# Altium PCB PCB1.PcbDoc (part 2 of 2)
Units mil, origin at the board's own origin, x right, y up, seen from the top; angles counter-clockwise.
Board outline 2954.24 x 1620.63 mil, 4 copper layers (Signal+GND, Signal, PWR, GND), stack 63.303 mil thick; 109 components, 81 nets, 322 pads, 116 vias.
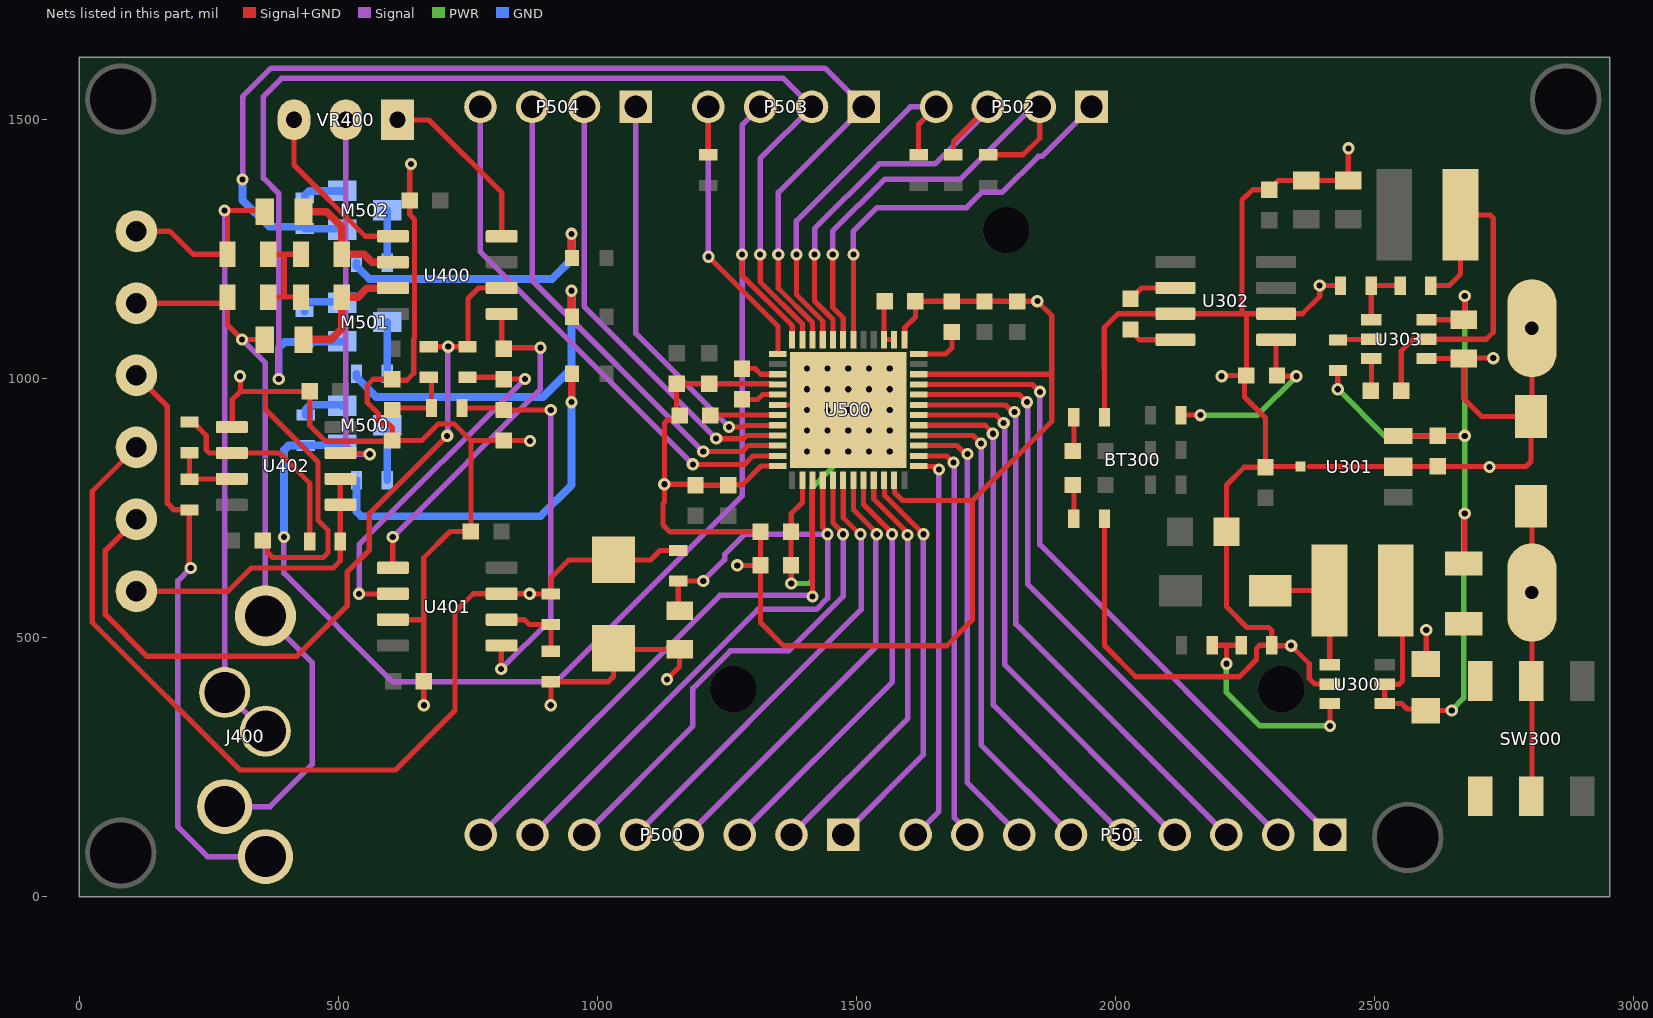
[diagram p4: the nets of this part, all layers, seen from the top]

## Via types
v1: diameter 23.62, hole 11.81, Signal+GND to GND, 116 vias

## Nets (pads, with @x,y where several pads share a name; then routed paths per layer and width w, separated by ;. In a path a pad name is that pad's centre, name@x,y a point inside that pad or via, vN(x,y) a via of type N, cw(c..) or ccw(c..) an arc to the next point about the centre after c; other vN are vias at no path point) (continued)
-5_ADC: C507.2 C508.2 U500.18 U500.26 U500.49 | length 763.9
  Signal+GND w10: U500.18@1348.44,949.84 1474.43,949.84 v1(1484.27,940) v1(1404.27,940) ; v1(1374.24,605) 1374.24,639.53 C508.2@1373.77,640 C507.2@1373.77,705 1374.24,705.47 1374.24,740 1395.69,761.45 U500.26@1395.69,804.17 ; U500.49@1395.69,848.8 1404.27,857.38 v1(1404.27,860)
  PWR w10.57: v1(1374.24,605) 1408.81,605 1415,611.19 1415,790.73 v1(1484.27,860)
  other v1: 1444.27,860 1524.27,860 1564.27,860 1404.27,900 1444.27,900 1484.27,900 1524.27,900 1564.27,900 1444.27,940 1524.27,940 1564.27,940 1404.27,980 1444.27,980 1484.27,980 1524.27,980 1564.27,980 1404.27,1020 1444.27,1020 1484.27,1020 1524.27,1020 1564.27,1020
-5OUT: C311.2 R309.1 U302.5 | length 361.5
  Signal+GND w10: R309.1@2126.8,929.82 2126.98,930 v1(2164.24,930) ; U302.5@2310.22,1075.63 2310.22,1008.25 2313.46,1005 v1(2349.24,1005)
  PWR w10.57: v1(2164.24,930) 2164.42,929.82 2274.07,929.82 v1(2349.24,1005)
A\D\C\_\R\D\Y\: P502.2 R501.1 U500.7 | length 889.8
  Signal+GND w10: v1(1454.24,1240) 1454.24,1137.74 1474.43,1117.55 U500.7@1474.43,1075.83 ; R501.1@1754.24,1432.49 1821.74,1432.49 1853.78,1464.54 P502.2@1853.78,1525
  Signal w10.57: v1(1454.24,1240) 1454.24,1285 1554.24,1385 1699.66,1385 1839.66,1525 P502.2@1853.78,1525
A\L\E\R\T\: P502.4 R503.1 U500.9 | length 717.4
  Signal+GND w10: v1(1384.24,1240) 1384.24,1162.49 1435.06,1111.67 U500.9@1435.06,1075.83 ; R503.1@1619.99,1432.49 1619.99,1491.21 P502.4@1653.78,1525
  Signal w10.57: v1(1384.24,1240) 1384.24,1305 1604.24,1525 P502.4@1653.78,1525
CCOMP: P500.1 U500.34 | length 779.7
  Signal+GND w10: U500.34@1553.17,804.17 1554.07,803.27 1554.07,775.17 v1(1629.24,700)
  Signal w10.57: P500.1@1474.7,120 1629.24,274.54 v1(1629.24,700)
DO_SNK_GATE: P501.2 U500.44 | length 1251.1
  Signal+GND w10: U500.44@1620.1,969.53 1814.71,969.53 v1(1829.24,955)
  Signal w10.57: v1(1829.24,955) 1830.81,953.43 1830.81,603.43 P501.2@2314.24,120
DO_SNK_INT: P501.1 U500.45 | length 1327
  Signal+GND w10: U500.45@1620.1,989.21 1840.03,989.21 v1(1854.24,975)
  Signal w10.57: v1(1854.24,975) 1854.24,680 P501.1@2414.24,120
DO_SNK_SNS: P501.3 U500.43 | length 1176.2
  Signal+GND w10: U500.43@1620.1,949.84 1787.61,949.84 1801.5,935.95 v1(1805.19,935.95)
  Signal w10.57: v1(1805.19,935.95) 1807.68,933.45 1807.68,526.56 P501.3@2214.24,120
DO_SRC_DGATE: P501.8 U500.38 | length 802.4
  Signal+GND w10: U500.38@1620.1,851.42 1674.14,851.42 1687.09,838.47 v1(1687.62,838.47)
  Signal w10.57: v1(1687.62,838.47) 1689.24,836.84 1689.24,152.4 1714.24,127.4 P501.8@1714.24,120
DO_SRC_GATE: P501.7 U500.39 | length 877.2
  Signal+GND w10: U500.39@1620.1,871.1 1694.45,871.1 1710.56,855 v1(1714.24,855)
  Signal w10.57: v1(1714.24,855) 1714.24,220 P501.7@1814.24,120
DO_SRC_INT: P501.5 U500.41 | length 1029.1
  Signal+GND w10: U500.41@1620.1,910.47 1748.77,910.47 1763.3,895.95 v1(1763.3,894.05)
  Signal w10.57: v1(1763.3,894.05) 1764.24,893.11 1764.24,370 P501.5@2014.24,120
DO_SRC_SNS: P501.6 U500.40 | length 953.9
  Signal+GND w10: U500.40@1620.1,890.79 1724.77,890.79 v1(1740.56,875)
  Signal w10.57: v1(1740.56,875) 1740.56,293.69 P501.6@1914.24,120
DO_VDD: P501.4 U500.42 | length 1102.1
  Signal+GND w10: U500.42@1620.1,930.16 1769.08,930.16 v1(1784.24,915)
  Signal w10.57: v1(1784.24,915) 1786.39,912.85 1786.39,447.85 P501.4@2114.24,120
GND: BT300.N C300.1 C301.1 C302.1 C303.2 C307.2 C308.1 C309.1 C310.1 C311.1 C403.1 C404.1 C405.1 C406.2 C407.1 C408.2 C409.1 C410.2 C500.1 C501.1 C502.1 C503.2 C504.1 C505.1 C506.1 C507.1 C508.1 C510.1 C511.1 C512.1 D301.1 D500.2 M500.2 M501.2 M502.2 R301.1 R302.1 R303.1 R305.1 R409.1 R508.1 R509.1 R510.1 U300.2 U301.2 U301.4 U302.3 U302.6 U303.1 U401.3 U402.5 U500.1 U500.16 U500.24 U500.35 U500.46 | length 10242.2
  Signal+GND w10: U402.5@294.24,906.95 295,907.71 295,960 310.92,975.92 ; v1(310,1005) 310.92,1004.08 310.92,975.92 ; C409.1@353.77,687.98 363.23,678.52 363.23,664.74 372.97,655 470.8,655 480,664.2 480,707.8 460.71,727.08 460.71,839.29 359.08,940.92 359.08,975.92 ; U401.3@605.44,535 664.77,535 ; v1(640,1415) 637.78,1412.78 C405.1@637.78,1344.16 637.78,1317.22 647.15,1307.85 647.15,1079.13 645.53,1077.5 645.53,1010.78 631.92,997.18 606.21,997.18 C406.2@604.24,999.14 567.45,999.14 555.77,987.46 555.77,954.23 577.49,932.51 577.49,919.62 584.42,912.69 597.31,912.69 604.24,905.76 C403.1@604.24,880.87 ; v1(665,370) 664.77,370.23 C407.1@664.77,416.23 664.77,535 ; v1(870,880) 869.13,880.87 C404.1@819.24,880.87 755.87,880.87 755.72,880.72 ; v1(910,370) 910.24,370.24 R409.1@910.24,415.23 1020.99,415.23 1031,425.24 D500.2@1031,479.96 1033.16,477.79 C504.1@1158.63,477.79 1158.63,444.38 v1(1134.24,420) ; v1(1270,640) C508.1@1314.71,640 ; U500.24@1348.44,831.73 1315.97,831.73 1279.87,795.63 1253.5,795.63 C505.1@1252.4,794.53 C506.1@1189.24,794.53 1187.27,796.5 v1(1129.24,796.5) ; U500.16@1348.44,989.21 1337.62,989.21 1336.36,990.47 C512.1@1216.08,990.47 C511.1@1152.92,990.47 1152.92,935.35 C510.1@1159,929.28 1150.18,920.47 1135.1,920.47 1129.24,914.61 v1(1129.24,796.5) ; U500.35@1572.85,804.17 1573.76,803.27 1573.76,780.48 1589.24,765 1724.24,765 ; U500.1@1592.54,1075.83 1593.44,1076.73 1593.44,1099.2 1613.77,1119.53 C503.2@1613.77,1150 1810.09,1150 C500.1@1810.56,1149.53 1811.03,1150 v1(1849.24,1150) 1877.05,1122.19 1877.05,917.81 1724.24,765 ; U500.46@1620.1,1008.9 1877.05,1008.9 ; R303.1@1978.77,729.86 1978.77,485.47 2039.24,425 2239.2,425 2272.27,458.07 2272.27,479.77 2278.13,485.63 R301.1@2301.8,485.63 ; R302.1@1978.77,925.92 1978.77,1018.7 1978.38,1019.08 1978.38,1099.14 2004.87,1125.63 U302.3@2115.73,1125.63 2244.24,1125.63 ; v1(2205,1005) 2206.66,1006.66 C311.1@2252.75,1006.66 ; U301.4@2357.31,830.63 2290.81,830.63 C303.2@2289.7,829.53 ; 2374.05,830.63 2374.52,831.1 C302.1@2622.27,831.1 2720.95,831.1 v1(2722.05,830) 2723.16,831.1 2792.75,831.1 2802.27,840.63 D301.1@2802.27,927.24 ; U300.2@2413.68,410.63 2413.52,410.79 2384.85,410.79 2374.24,421.4 2374.24,450 v1(2339.24,485) 2302.43,485 R301.1@2301.8,485.63 ; R305.1@2434.71,1180 v1(2394.24,1180) 2394.24,1159.21 2360.66,1125.63 U302.6@2310.22,1125.63 2252.75,1125.63 ; v1(2450,1445) 2449.55,1444.55 C309.1@2449.55,1383.03 C310.1@2368.67,1383.03 2314.53,1383.03 C307.2@2296.65,1365.16 2264.4,1365.16 2244.24,1345 2244.24,1125.63 ; C300.1@2590.56,449.3 C300.1@2591.83,448.03 ; C300.1@2599.24,449.27 2600,450.03 v1(2600,515) ; U303.1@2600.42,1039.22 C308.1@2672.27,1039.22 ; v1(2729.24,1040) 2673.05,1040 C308.1@2672.27,1039.22 ; BT300.N@2804.01,1097.63 2804.01,928.98 D301.1@2802.27,927.24 ; 310.92,975.92 359.08,975.92 ; 359.08,975.92 C410.2@444.71,975.92 444.71,909.93 474.89,879.76 534.21,879.76 534.26,879.71 603.08,879.71 C403.1@604.24,880.87 ; C403.1@604.24,880.87 660.87,880.87 692.81,912.81 723.62,912.81 755.72,880.72 ; 664.77,535 664.77,654.77 715.2,705.2 C408.2@755.72,705.2 755.72,880.72 ; v1(1129.24,796.5) 1129.24,762.43 1126.43,759.62 1126.43,717.81 1139.24,705 C507.1@1314.71,705 C508.1@1314.71,640 ; C508.1@1314.71,640 1314.71,529.53 1359.24,485 1674.24,485 1724.24,535 1724.24,765 ; 2244.24,1125.63 2252.75,1125.63 ; C311.1@2252.75,1006.66 2252.75,1125.63 ; C311.1@2252.75,1006.66 2249.24,1003.16 2249.24,965 2289.7,924.54 C303.2@2289.7,829.53 ; C303.2@2289.7,829.53 2248.77,829.53 2214.24,795 C301.1@2214.24,705 2214.24,560 2254.24,520 2295.94,520 2301.8,514.14 R301.1@2301.8,485.63 ; C308.1@2672.27,1039.22 2672.27,961.97 2707,927.24 D301.1@2802.27,927.24
  GND w14.88: R509.1@434.59,1130.1 434.59,1141.07 442.34,1148.83 505.61,1148.83 M501.2@507.32,1147.11 ; R510.1@435,1349.06 435,1354.08 443.71,1362.8 M502.2@507.32,1362.8 ; R508.1@437.2,930.27 437.2,941.24 445.91,949.95 505.17,949.95 M500.2@507.32,947.8
GPIOA: P504.1 U500.20 | length 787.7
  Signal+GND w10: v1(1254.24,907.35) 1283.16,907.35 1286.05,910.24 1348.21,910.24 U500.20@1348.44,910.47
  Signal w10.57: P504.1@1074.24,1525 1074.24,1087.35 v1(1254.24,907.35)
GPIOB: P504.2 U500.21 | length 867.6
  Signal+GND w10: v1(1229.24,885) 1229.71,884.54 1281.86,884.54 1288.11,890.79 U500.21@1348.44,890.79
  Signal w10.57: P504.2@974.24,1525 974.24,1140 v1(1229.24,885)
GPIOC: P504.3 U500.22 | length 950.5
  Signal+GND w10: v1(1204.24,860) 1279.95,860 1291.05,871.1 U500.22@1348.44,871.1
  Signal w10.57: P504.3@874.24,1525 874.24,1190 v1(1204.24,860)
GPIOD: P504.4 U500.23 | length 1030.8
  Signal+GND w10: v1(1184.24,835) 1284.24,835 1300.66,851.42 U500.23@1348.44,851.42
  Signal w10.57: P504.4@774.24,1525 774.24,1245 v1(1184.24,835)
INPUT_N: C401.2 R405.1 U400.2 | length 244.1
  Signal+GND w15: C401.2@432.62,1322.53 477.47,1322.53 506.49,1293.51 R405.1@506.49,1240.67 549.33,1240.67 565,1225 605.05,1225 U400.2@605.24,1225.2
INPUT_P: C400.2 R401.2 U400.3 | length 249.7
  Signal+GND w15: C400.2@432.62,1075.96 485.96,1075.96 506.49,1096.49 R401.2@506.49,1157.82 537.82,1157.82 555,1175 605.05,1175 U400.3@605.24,1175.2
LA_Electrode: C401.1 J400.3 J400.4 R404.1 TP404.TP1 | length 1398.4
  Signal+GND w10: TP404.TP1@110,1285 175,1285 219.33,1240.67 R404.1@285.85,1240.67 285.85,1319.15 v1(280,1325) ; v1@283.69,1321.31 283.69,1322.39 286.29,1325 355.34,1325 C401.1@357.81,1322.53
  Signal w10.57: v1(280,1325) 280.25,1324.75 280.25,395.05 J400.4@280.5,394.8 282.47,394.8 357.27,320 J400.3@359.24,320
LVIN: P501.9 U500.37 | length 765.6
  Signal+GND w10: U500.37@1620.1,831.73 1621,830.83 1649.73,830.83 1655.56,825 v1(1659.24,825)
  Signal w10.57: P501.9@1614.24,120 1659.24,165 v1(1659.24,825)
NetC305_1: C305.1 U303.6 | length 62.7
  Signal+GND w10: C305.1@2492.76,977.04 2494.12,978.4 U303.6@2494.12,1039.22
NetC305_2: C305.2 L301.1 R304.2 U303.2 | length 736.5
  Signal+GND w10: C305.2@2551.82,977.04 2551.82,1053.61 2574.83,1076.62 U303.2@2600.42,1076.62 2715.87,1076.62 2729.24,1090 2729.24,1310.77 2723.38,1316.62 L301.1@2666.25,1316.62 2666.25,1202.01 2644.24,1180 R304.2@2608.77,1180
NetC306_1: C306.1 U302.4 | length 96.6
  Signal+GND w10: C306.1@2029.24,1095.47 2039.99,1084.72 2039.99,1081.49 2045.85,1075.63 U302.4@2115.73,1075.63
NetC306_2: C306.2 U302.2 | length 95.2
  Signal+GND w10: C306.2@2029.24,1154.53 2050.34,1175.63 U302.2@2115.73,1175.63
NetC402_1: C402.1 R406.1 U401.2 | length 725.6
  Signal+GND w10: v1(540,585) 605.05,585 U401.2@605.24,585.2 ; R406.1@749.24,1003.06 815.32,1003.06 C402.1@819.24,999.14 820.1,1000 v1(860,1000)
  Signal w10.57: v1(540,585) 540,680 v1(860,1000)
NetC402_2: C402.2 U400.5 U401.1 | length 681.6
  Signal+GND w10: v1(605,695) 605,635.44 U401.1@605.24,635.2 ; U400.5@815.24,1125.2 815.24,1062.2 817.44,1060 v1(890,1060)
  Signal w10.57: v1(605,695) 890,980 v1(890,1060)
NetC403_2: C403.2 R402.2 R403.1 | length 138.6
  Signal+GND w10: C403.2@604.24,939.92 608.13,943.81 R403.1@679.71,943.81 679.71,997.59 R402.2@674.24,1003.06
NetC404_2: C404.2 R403.2 U401.5 | length 758.1
  Signal+GND w10: R403.2@738.77,943.81 817.73,943.81 821.54,940 v1(910,940) ; v1(814.24,440) 814.24,484.2 U401.5@815.24,485.2
  Signal w10.57: v1(814.24,440) 910,535.76 v1(910,940)
NetC502_2: C502.2 U500.48 | length 99.5
  Signal+GND w10: U500.48@1620.1,1048.27 1672.51,1048.27 1684.24,1060 C502.2@1684.24,1090.47
NetC503_1: C503.1 U500.2 U500.3 | length 94.5
  Signal+GND w10: C503.1@1554.71,1150 1553.17,1148.45 U500.3@1553.17,1075.83 U500.2@1572.85,1075.83
NetC509_1: C509.1 U500.17 | length 73.3
  Signal+GND w10: C509.1@1279.24,960.47 1279.71,960 1309.24,960 1318.77,969.53 U500.17@1348.44,969.53
NetC509_2: C509.2 U500.15 | length 74
  Signal+GND w10: C509.2@1279.24,1019.53 1279.71,1020 1304.24,1020 1315.34,1008.9 U500.15@1348.44,1008.9
NetC510_2: C510.2 U500.19 | length 130.8
  Signal+GND w10: C510.2@1218.05,929.28 1218.93,930.16 U500.19@1348.44,930.16
NetD300_1: D300.1 L300.2 U300.1 | length 258.2
  Signal+GND w10: D300.1@2298.89,590.63 2299.63,591.37 L300.2@2413.3,591.37 2413.68,590.99 U300.1@2413.68,448.03
NetD302_1: D302.1 R302.2 | length 65.9
  Signal+GND w10: D302.1@1917.88,860.77 1919.71,862.61 R302.2@1919.71,925.92
NetD303_1: D303.1 R303.2 | length 65.9
  Signal+GND w10: D303.1@1917.88,795 1919.71,793.16 R303.2@1919.71,729.86
NetD501_1: D501.1 R505.2 | length 719.1
  Signal+GND w14.88: v1(950,955) 950.39,955.39 950.39,1009.61 D501.1@950.78,1010
  GND w14.88: R505.2@535.1,804.09 535.1,743.71 543.82,735 890,735 950,795 v1(950,955)
NetD502_1: D502.1 R506.2 | length 660.7
  Signal+GND w14.88: v1(950,1170) 950.39,1169.61 950.39,1120.39 D502.1@950.78,1120
  GND w14.88: R506.2@535.1,1010.05 535.1,1003.16 573.27,965 895,965 950,1020 v1(950,1170)
NetD503_1: D503.1 R507.2 | length 544.1
  Signal+GND w14.88: v1(950,1280) 950.39,1279.61 950.39,1233.55 D503.1@950.78,1233.16
  GND w14.88: R507.2@535.1,1224.09 535.1,1217.2 559.37,1192.93 912.52,1192.93 950,1230.41 v1(950,1280)
NetF300_1: F300.1 SW300.1 SW300.4
NetM500_3: M500.3 R505.1 | length 106.3
  GND w14.88: R505.1@594.16,804.09 M500.3@594.16,910.4
NetM501_3: M501.3 R506.1 | length 99.7
  GND w14.88: M501.3@593.94,1109.71 594.16,1109.49 R506.1@594.16,1010.05
NetM502_3: M502.3 R507.1 | length 101.4
  GND w14.88: M502.3@593.94,1325.4 594.16,1325.18 R507.1@594.16,1224.09
NetR300_1: R300.1 R301.2 U300.3 | length 417
  Signal+GND w10: R300.1@2186.8,485.63 2214.24,485.63 ; v1(2214.24,450) 2214.24,485.63 ; R301.2@2242.75,485.63 2214.24,485.63 ; U300.3@2413.68,373.23 2414.24,372.67 v1(2414.24,330)
  PWR w10.57: v1(2214.24,450) 2214.24,395 2259.24,350 2279.24,330 v1(2414.24,330)
NetR304_1: R304.1 R305.2 U303.4 | length 122.1
  Signal+GND w10: U303.4@2494.12,1114.03 2493.77,1114.38 R305.2@2493.77,1180 R304.1@2549.71,1180
NetR306_1: R306.1 U303.5 | length 65.1
  Signal+GND w10: R306.1@2429.59,1075.16 2430.32,1075.89 2493.39,1075.89 U303.5@2494.12,1076.62
NetR400_1: R400.1 R401.1 R404.2 R405.2 | length 209.2
  Signal+GND w10: R400.1@364.59,1157.82 396.17,1157.82 ; R404.2@364.59,1240.67 396.17,1240.67 ; R401.1@427.75,1157.82 396.17,1157.82 ; R405.2@427.75,1240.67 396.17,1240.67 ; 396.17,1157.82 396.17,1240.67
NetR402_1: R402.1 R406.2 TP400.TP1 U400.6 | length 1571.9
  Signal+GND w10: R402.1@674.24,1062.12 v1(712.01,1062.12) R406.2@749.24,1062.12 750,1062.88 750,1155 770.2,1175.2 U400.6@815.24,1175.2
  Signal+GND w10.57: TP400.TP1@110,729 50,669 50,545 130,465 420,465 516.9,561.9 516.9,626.9 560,670 560,740 v1(710,890)
  Signal w10.57: v1(710,890) 711,891 711,1061.11 v1(712.01,1062.12)
NetR408_1: R408.1 R409.2 U401.6 | length 150.3
  Signal+GND w10: U401.6@815.24,535.2 815.44,535 859.24,535 868.57,525.67 R408.1@910.24,525.67 R409.2@910.24,474.29
NetR410_2: R410.2 R412.1 U402.7 | length 133.5
  Signal+GND w10: R412.1@212.51,857.42 R410.2@212.51,806.04 212.96,806.49 293.79,806.49 U402.7@294.24,806.95
NetR411_1: R411.1 R412.2 U402.6 | length 409.9
  Signal+GND w10: R412.2@212.51,916.48 219.4,916.48 245,890.88 245,862.81 250.86,856.95 U402.6@294.24,856.95 386.14,856.95 444.71,798.37 R411.1@444.71,686
NetR411_2: R411.2 TP402.TP1 U402.1 U402.2 | length 576.5
  Signal+GND w10: TP402.TP1@110,590 286.97,590 331.97,635 490,635 503.77,648.77 R411.2@503.77,686 503.77,806.48 U402.2@504.24,806.95
NetU400_1: U400.1 VR400.3 | length 335.2
  Signal+GND w10: VR400.3@414.24,1500 414.24,1412.85 551.9,1275.2 U400.1@605.24,1275.2
NetU400_8: U400.8 VR400.1 | length 343.7
  Signal+GND w10: VR400.1@614.24,1500 675,1500 815.24,1359.76 U400.8@815.24,1275.2
NetU402_3: U402.3 VR400.2 | length 738.7
  Signal+GND w10: U402.3@504.24,856.95 505.52,855.67 559.35,855.67 v1(560.63,854.4)
  Signal w10.57: VR400.2@514.24,1500 514.24,872.76 532.61,854.4 v1(560.63,854.4)
PPC_CTRL: P502.1 U500.6 | length 768.2
  Signal+GND w10: U500.6@1494.11,1075.83 1494.18,1075.89 1494.18,1239.94 v1(1494.24,1240)
  Signal w10.57: v1(1494.24,1240) 1494.24,1285 1539.9,1330.66 1712.59,1330.66 1742.35,1360.42 1782,1360.42 1851.18,1429.6 1858.38,1429.6 P502.1@1953.78,1525
R\E\S\E\T\: P502.3 R502.1 U500.8 | length 785.5
  Signal+GND w10: v1(1419.24,1240) 1419.24,1150.11 1454.74,1114.61 U500.8@1454.74,1075.83 ; R502.1@1687.11,1432.49 1687.11,1458.33 P502.3@1753.78,1525
  Signal w10.57: v1(1419.24,1240) 1419.24,1290 1544.24,1415 1651.67,1415 1753.78,1517.11 P502.3@1753.78,1525
RA_Electrode: C400.1 J400.2 J400.5 R400.2 TP405.TP1 | length 1397.1
  Signal+GND w10: TP405.TP1@110,1146 275.1,1146 R400.2@285.85,1156.75 ; R400.2@285.85,1157.82 R400.2@285.85,1156.75 ; C400.1@357.81,1075.96 v1(314.04,1075.96) 285.85,1104.15 R400.2@285.85,1156.75
  Signal w10.57: J400.2@280.5,174.33 368.14,174.33 450,256.19 450,451.68 J400.5@359.24,542.44 359.24,1030.76 v1(314.04,1075.96)
RL_Electrode: J400.1 R410.1 TP403.TP1 | length 1136
  Signal+GND w10.57: TP403.TP1@110,1007 170,947 170,760 183.01,746.99 R410.1@212.51,746.99 212.51,637.49 v1(215,635)
  Signal w10.57: v1(215,635) 190,610 190,135 247.13,77.87 J400.1@359.24,77.87
S\Y\N\C\: P503.4 R504.2 U500.13 | length 627.8
  Signal+GND w10: R504.2@1214.24,1429.53 P503.4@1214.24,1525 ; v1(1214.28,1235.72) 1348.44,1101.56 U500.13@1348.44,1048.27
  Signal w10.57: v1(1214.28,1235.72) P503.4@1214.28,1524.97
SCLK: M502.1 P503.1 R510.2 U500.10 | length 2214.5
  Signal+GND w10: v1(1349.24,1240) 1349.24,1174.86 1415.37,1108.73 U500.10@1415.37,1075.83
  Signal w10.57: v1(315,1385) 315,1545 370,1600 1439.24,1600 P503.1@1514.24,1525 1349.24,1360 v1(1349.24,1240)
  GND w14.88: v1(315,1385) 315,1345 366.61,1293.39 431.61,1293.39 R510.2@435,1290 507.32,1290 M502.1@508.33,1289
SDI: M501.1 P503.2 R509.2 U500.11 | length 2365.7
  Signal+GND w10: v1(1314.24,1240) 1314.24,1187.23 1395.69,1105.78 U500.11@1395.69,1075.83
  Signal w10.57: v1(385,1000) 385,1357.35 355,1387.35 355,1545 390,1580 1359.24,1580 P503.2@1414.24,1525 1314.24,1425 v1(1314.24,1240)
  GND w14.88: v1(385,1000) 385,1060 396.04,1071.04 R509.2@434.59,1071.04 435.22,1071.67 506.69,1071.67 M501.1@507.32,1072.31
SDO: M500.1 P503.3 R508.2 U500.12 | length 2443.5
  Signal+GND w10: v1(1279.24,1240) 1279.24,1199.6 1376,1102.84 U500.12@1376,1075.83
  Signal w10.57: v1(395,695) 395,625 604.77,415.23 920.23,415.23 1279.24,774.24 v1(1279.24,1240) 1279.24,1490 P503.3@1314.24,1525
  GND w14.88: v1(395,695) 395,862.5 403.71,871.21 R508.2@437.2,871.21 438.09,872.1 506.43,872.1 M500.1@507.32,872.99
SENSE_EXT1: C504.2 P500.7 R500.1 U500.28 | length 1379.9
  Signal+GND w10: C504.2@1158.63,552.6 1156,555.23 R500.1@1156,609.87 1156.06,609.93 1204.18,609.93 v1(1204.24,610) ; U500.28@1435.06,804.17 1435.06,712.87 1444.24,703.69 v1(1444.24,700)
  Signal w10.57: P500.7@874.7,120 1309.7,555 1422.66,555 1444.24,576.58 v1(1444.24,700) 1284.24,700 1245.49,661.25 1245.49,651.25 v1(1204.24,610)
SENSE_EXT2: P500.8 U500.27 | length 1056.7
  Signal+GND w10: v1(1415,580) 1415.19,580.19 1415.19,803.99 U500.27@1415.37,804.17
  Signal w10.57: P500.8@774.7,120 1236.61,581.9 1413.1,581.9 v1(1415,580)
SENSEH: P500.3 U500.32 | length 829.1
  Signal+GND w10: U500.32@1513.8,804.17 1513.8,757.7 1568.86,702.64 v1(1568.86,700.03)
  Signal w10.57: P500.3@1274.7,120 1569.24,414.54 1569.24,699.65 v1(1568.86,700.03)
SENSEHF: P500.4 U500.31 | length 853.9
  Signal+GND w10: U500.31@1494.11,804.17 1494.11,747.39 1539.24,702.26 v1(1539.24,700)
  Signal w10.57: P500.4@1174.7,120 1537.59,482.88 1537.59,698.35 v1(1539.24,700)
SENSEL: P500.5 U500.30 | length 879.4
  Signal+GND w10: U500.30@1474.43,804.17 1474.43,732.07 1506.5,700 v1(1507.87,700)
  Signal w10.57: P500.5@1074.7,120 1509.24,554.54 1509.24,698.63 v1(1507.87,700)
SENSELF: P500.6 U500.29 | length 965
  Signal+GND w10: U500.29@1454.74,804.17 1454.74,721.76 1474.24,702.26 v1(1474.24,700)
  Signal w10.57: P500.6@974.7,120 1184.24,329.54 1184.24,402.46 1256.78,475 1369.24,475 1474.24,580 v1(1474.24,700)
TO_ADC: D500.1 R408.2 R500.2 TP401.TP1 U401.7 | length 1927.9
  Signal+GND w10: TP401.TP1@110,868 25,783 25,530 310,245 610,245 725,360 725,550 760.2,585.2 U401.7@815.24,585.2 815.34,585.1 869.14,585.1 v1(869.24,585) 869.38,584.86 910.11,584.86 R408.2@910.24,584.72 910.24,616 944.67,650.43 D500.1@1031,650.43 1102.26,650.43 1102.36,650.33 1120.94,668.92 R500.2@1156,668.92
VCC: C300.2 C302.2 C308.2 F300.2 L300.1 R306.2 U300.4 U300.5 U301.3 U303.3 | length 1866.5
  Signal+GND w10: v1(2429.24,980) 2429.24,1015.76 R306.2@2429.59,1016.1 ; L300.1@2544.88,595 2554.24,585.63 2554.24,416.49 2548.38,410.63 U300.5@2519.98,410.63 U300.4@2519.98,373.23 2552.13,373.23 2562.6,362.76 2596.48,362.76 2599.24,360 v1(2649.24,360) ; U301.3@2546.29,889.69 2546.6,890 v1(2674.24,890) ; U303.3@2600.42,1114.03 C308.2@2672.27,1114.03 2674.24,1115.99 v1(2674.24,1160) ; v1(2674.24,740) 2674.24,651.73 F300.2@2682.27,643.7
  PWR w10.57: v1(2429.24,980) 2519.24,890 v1(2674.24,890) ; v1(2649.24,360) 2649.24,360.54 2672.28,383.57 2672.28,738.03 v1(2674.24,740) v1(2674.24,890) ; v1(2674.24,1160) v1(2674.24,890)
VCC_9V: BT300.P D301.2 SW300.2 SW300.5 | length 561
  Signal+GND w10: SW300.5@2802.27,194.41 2804.01,196.15 BT300.P@2804.01,587.63 2804.01,752.28 D301.2@2802.27,754.02
VIOUT: P500.2 U500.33 | length 804.4
  Signal+GND w10: U500.33@1533.48,804.17 1533.48,768.02 1591.32,710.18 1591.32,709.34 1598.45,702.22 v1(1598.45,698.53)
  Signal w10.57: P500.2@1374.7,120 1599.24,344.54 1599.24,697.74 v1(1598.45,698.53)
pads on no net: BT300. H400.1 H401.1 H402.1 H403.1 SW300.3 SW300.6 U300.6 U302.1 U302.7 U500.4 U500.5 U500.36

## Polygon pours and split planes (outlines as drawn)
GND on Signal+GND "GND_L01_P001" (solid, remove dead copper, pour order 1): 607.58,1620 2335,1620 1890,1175 1890,510 2150,250 2408.85,250 2464.24,194.61 2464.24,0 585,0 940,355 940,1293.03
GND on Signal+GND "GND_L01_P002" (solid, remove dead copper, pour order 2): 2954.24,1620.63 2953.61,1620 2345,1620 1900,1175 1900,515 2155,260 2415,260 2478.02,196.98 2478.02,0 2954.24,0
GND on Signal+GND "GND_L01_P000" (solid, remove dead copper, pour order 0): 0,1620.63 0.63,1620 600,1620 930,1290 930,360 570,0 0,0
GND on GND "GND_L04_P003" (solid, remove dead copper, pour order 3): 0,1620.63 0.63,1620 2953.61,1620 2953.61,0.63 2954.24,0 0,0

## Keep-outs
Keep-Out Layer:
  the board outline again, w5

## Other copper
Signal+GND:
  region net +6: 2359.24,1205 2374.24,1220 2579.24,1220 2579.24,1413.08 2495.97,1413.08 2495.97,1357.61 2474,1335.63 2271.06,1335.63 2271.06,1205
  region net VCC: 2704.24,1095 2704.24,1175 2664.24,1175 2627.91,1138.67 2577.82,1138.67 2574.24,1135.09 2574.24,1095
  region net VCC: 2514.24,910 2689.24,910 2689.24,860 2684.24,865 2514.24,865
  region net +5OUT: 2574.24,790 2264.24,790 2264.11,789.87 2264.11,746.85 2574.24,746.85
  region net NetD300_1: 2306.94,555 2254.24,555 2254.24,625 2308.14,625 2373.14,690 2454.24,690 2454.24,495 2454.16,494.92 2370.97,494.92
  region net +12OUT: 2094.24,823.19 2146.49,823.19 2146.49,647.76 2169.24,625 2169.24,535 2139.24,505 2139.24,465 2114.24,465 2114.24,505.67 2084.24,535.67 2084.24,631.86 2094.24,641.86
  region net VCC: 2624.24,615 2624.24,730 2649.24,755 2689.24,755 2719.24,725 2719.24,615
  region net VCC_9V: 2744.24,795 2859.24,795 2859.24,150 2744.24,150
  region net NetF300_1: 2624.24,555 2714.24,555 2734.24,535 2734.24,150 2674.24,150 2669.24,155 2669.24,460 2624.24,505
PWR:
  region net -5_ADC: 1329.24,1095 1639.24,1095 1639.24,785 1329.24,785
  region net VCC: 2402.03,996.42 2580.61,1175 2704.24,1175 2704.24,330 2702.51,328.27 2632.24,328.27 2632.24,639.16 2402.03,869.38

## Silkscreen, mask and mechanical layers (free items; w line width, h text height)
Top Overlay:
  lines w2: 271.09,662.23 379.52,662.23 379.52,713.57 271.09,713.57 271.09,662.23 ; 332.22,1041.52 458.21,1041.52 458.21,1108.49 332.22,1108.49 332.22,1041.52 ; 332.22,1290 458.21,1290 458.21,1356.98 332.22,1356.98 332.22,1290 ; 418.97,950.32 527.39,950.32 527.39,1001.66 418.97,1001.66 418.97,950.32 ; 578.49,857.24 578.49,965.67 629.83,965.67 629.83,857.24 578.49,857.24 ; 578.65,973.4 578.65,1081.82 629.99,1081.82 629.99,973.4 578.65,973.4 ; 579.97,390.64 688.39,390.64 688.39,441.98 579.97,441.98 579.97,390.64 ; 729.97,679.61 838.39,679.61 838.39,730.94 729.97,730.94 729.97,679.61 ; 793.49,975.52 793.49,1083.95 844.83,1083.95 844.83,975.52 793.49,975.52 ; 793.65,855.12 793.65,963.54 844.99,963.54 844.99,855.12 793.65,855.12 ; 1123.33,962.85 1123.33,1071.28 1174.67,1071.28 1174.67,962.85 1123.33,962.85 ; 1124.18,452.2 1193.07,452.2 1193.07,578.19 1124.18,578.19 1124.18,452.2 ; 1133.25,903.69 1241.67,903.69 1241.67,955.03 1133.25,955.03 1133.25,903.69 ; 1163.49,709.72 1163.49,818.15 1214.83,818.15 1214.83,709.72 1163.49,709.72 ; 1186.49,962.85 1186.49,1071.28 1237.83,1071.28 1237.83,962.85 1186.49,962.85 ; 1226.65,709.72 1226.65,818.15 1277.99,818.15 1277.99,709.72 1226.65,709.72 ; 1253.65,936.85 1253.65,1045.28 1304.99,1045.28 1304.99,936.85 1253.65,936.85 ; 1288.97,614.41 1397.39,614.41 1397.39,665.75 1288.97,665.75 1288.97,614.41 ; 1288.97,679.41 1397.39,679.41 1397.39,730.75 1288.97,730.75 1288.97,679.41 ; 1531.09,1124.25 1639.52,1124.25 1639.52,1175.59 1531.09,1175.59 1531.09,1124.25 ; 1658.65,1066.85 1658.65,1175.28 1709.99,1175.28 1709.99,1066.85 1658.65,1066.85 ; 1721.81,1066.85 1721.81,1175.28 1773.15,1175.28 1773.15,1066.85 1721.81,1066.85 ; 1784.97,1066.85 1784.97,1175.28 1836.31,1175.28 1836.31,1066.85 1784.97,1066.85 ; 2003.65,1071.85 2003.65,1180.28 2054.99,1180.28 2054.99,1071.85 2003.65,1071.85 ; 2227,981.07 2335.42,981.07 2335.42,1032.41 2227,1032.41 2227,981.07 ; 2264.11,746.85 2264.11,855.28 2315.45,855.28 2315.45,746.85 2264.11,746.85 ; 2271.06,1282.48 2271.06,1390.91 2322.4,1390.91 2322.4,1282.48 2271.06,1282.48 ; 2334.22,1282.64 2403.12,1282.64 2403.12,1408.62 2334.22,1408.62 2334.22,1282.64 ; 2415.1,1282.64 2484,1282.64 2484,1408.62 2415.1,1408.62 2415.1,1282.64 ; 2469.14,951.29 2577.57,951.29 2577.57,1002.63 2469.14,1002.63 2469.14,951.29 ; 2596.53,805.35 2596.53,913.78 2647.86,913.78 2647.86,805.35 2596.53,805.35 ; 2633.97,1012.69 2702.86,1012.69 2702.86,1138.67 2633.97,1138.67 2633.97,1012.69
  text "D" at 791.24,1433 h30 r90
  text "C" at 891.24,1433 h30 r90
  text "B" at 991.24,1433 h30 r90
  text "A" at 1091.24,1433 h30 r90
  text "SYNC" at 1361.24,1343 h30 r90
  text "SDO" at 1406.24,1343 h30 r90
  text "SDI" at 1451.24,1343 h30 r90
  text "SCLK" at 1498.76,1341.79 h30 r90
  text "ALERT" at 1861.24,1318 h30 r90
  text "RESET" at 1901.24,1318 h30 r90
  text "LA" at 47,1263 h30 r90
  text "ADC_RDY" at 1941.24,1258 h30 r90
  text "PPC_CTRL" at 1991.24,1228 h30 r90
  text "RA" at 47,1123 h30 r90
  text "RL" at 47,978 h30 r90
  text "A_IN" at 47,818 h30 r90
  text "LVIN" at 1616.24,198 h30 r90
  text "VDD" at 2096.24,198 h30 r90
  text "SNS_EXT2" at 796.86,193 h30 r90
  text "SNS_EXT1" at 861.24,193 h30 r90
  text "SNSLF" at 991.24,193 h30 r90
  text "SNSL" at 1086.24,193 h30 r90
  text "SNSHF" at 1181.24,193 h30 r90
  text "SNSH" at 1291.24,193 h30 r90
  text "VIOUT" at 1391.24,193 h30 r90
  text "CCOMP" at 1491.24,193 h30 r90
  text "SRC_DG" at 1726.24,193 h30 r90
  text "SRC_G" at 1821.24,193 h30 r90
  text "SRC_SNS" at 1926.24,193 h30 r90
  text "SRC_INT" at 2031.24,193 h30 r90
  text "SNK_SNS" at 2146.24,193 h30 r90
  text "SNK_G" at 2211.24,193 h30 r90
  text "SNK_INT" at 2261.24,193 h30 r90

## Text inside footprints (layer, text, board x,y; h text height)
D302: Top Overlay "+" at 2032.05,848.96 h30 r90
D303: Top Overlay "+" at 2032.05,783.19 h30 r90
D501: Top Overlay "+" at 1068.89,998.19 h30 r90
D502: Top Overlay "+" at 1068.89,1108.19 h30 r90
D503: Top Overlay "+" at 1068.89,1221.35 h30 r90
P500: Top Overlay "8" at 789.67,53.07 h40 r180; Top Overlay "1" at 1479.43,53.07 h40 r180
P501: Top Overlay "1" at 2418.97,53.07 h40 r180; Top Overlay "9" at 1629.2,53.07 h40 r180